# EAGLE board board (EAGLE 9.2.2)
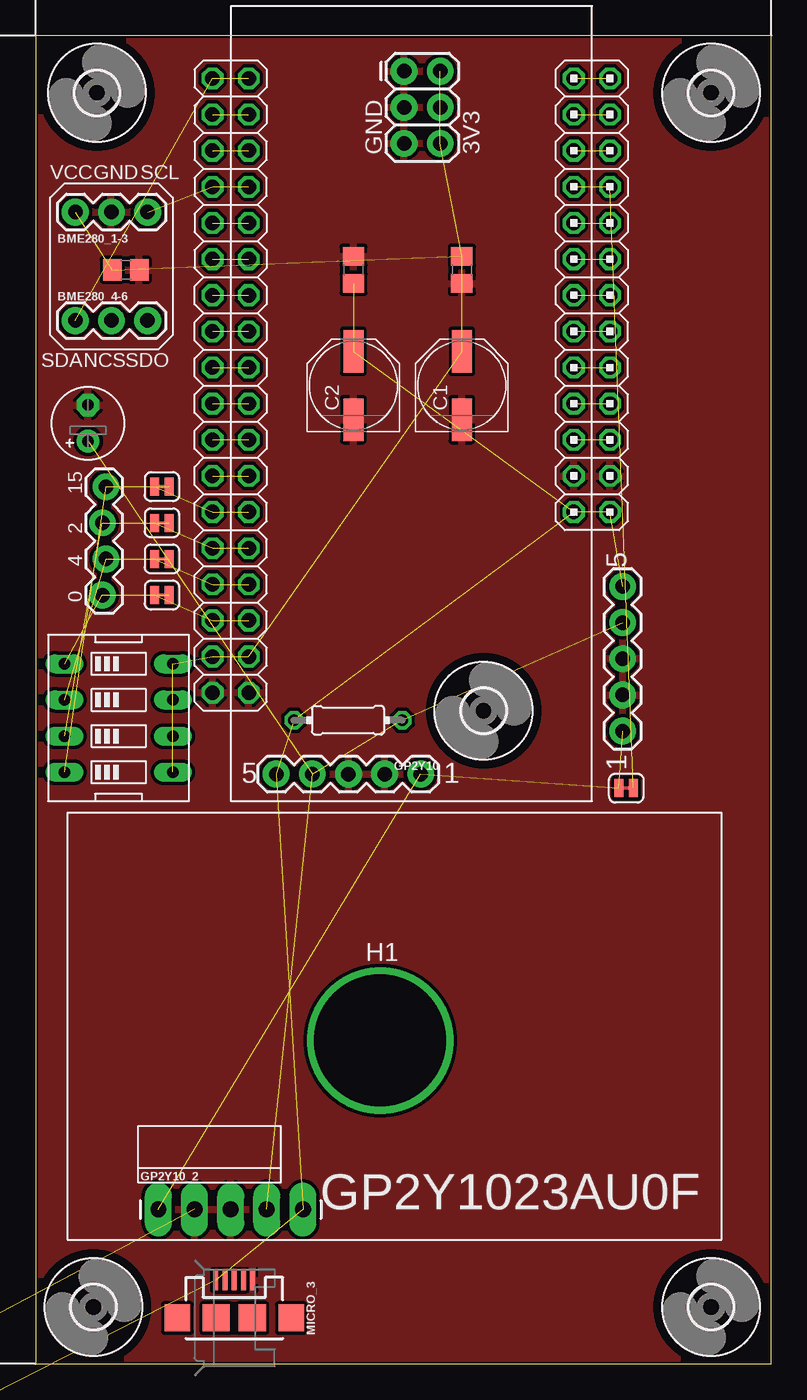
[diagram p0: board, top side]
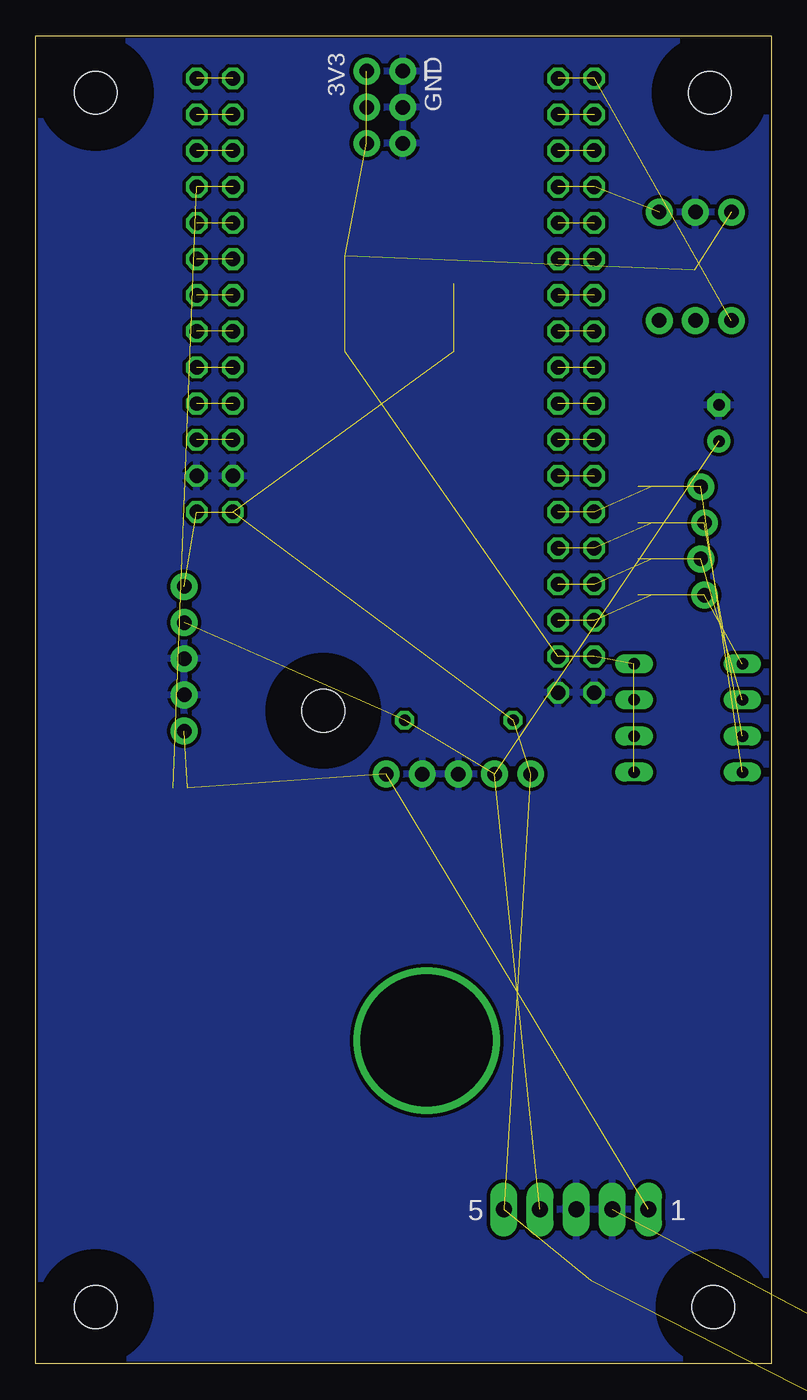
[diagram p1: board, bottom side, seen from below]

Size 51.73 x 93.37 mm. Coordinates in mm from the lower left corner, seen from the top.
Outline: 0,0 51.73,0 51.73,93.37 0,93.37 0,0
Copper layers (1*16): Top 0.035mm / dielectric 1.5mm / Bottom 0.035mm
Design rules "default *": minimum track width 6mil, minimum drill 0.35mm, track to track 6mil, track to pad 6mil, pad to pad 6mil, via to via 6mil, smd to smd 6mil, copper to edge 6mil, drill to drill 6mil, minimum pad ring 10mil, minimum via ring 8mil, stop-mask expansion 4mil, vias tented up to drill 0mil, thermal gap 10mil
Net classes: 0 default: width 0.254 mm, clearance 0.205 mm; 1 power: width 0.914 mm, clearance 0.254 mm

## Footprints (pad centres in the part's own frame; a part is rotated, then mirrored left to right if it is on the bottom)
1X03 = drill 1.016 pad 1.88: 1 0,0; 2 2.54,0; 3 5.08,0
PANASONIC_D = smd 3 x 1.4: + 2.4,0; - -2.4,0
C0805 = smd 1.3 x 1.5: 1 -0.95,0; 2 0.95,0
E2,5-5 = drill 0.813 pad 1.6: + -1.27,0 | drill 0.813 pad 1.6 octagon: - 1.27,0
0204/7 = drill 0.813 octagon: 1 -3.81,0; 2 3.81,0
1X05 = drill 1.016 pad 1.88: 1 0,0; 2 2.54,0; 3 5.08,0; 4 7.62,0; 5 10.16,0
1X05_LONGPADS = drill 1.118 pad 1.88 long: 1 0,0; 2 2.54,0; 3 5.08,0; 4 7.62,0; 5 10.16,0
PAD_0.3650 = drill 9.271 pad 9.271: 1 0,0
2,8 = hole 2.8: 0,0
3,0 = hole 3: 0,0
1X04_LOCK = drill 1.016 pad 1.88: 1 0,0.127; 2 2.54,-0.127; 3 5.08,0.127; 4 7.62,-0.127
SMT-JUMPER_2_NC_TRACE_SILK = smd 0.635 x 1.27: 1 -0.508,0; 2 0.508,0
2X18 = drill 1.016 octagon: 1 -21.59,-1.27; 2 -21.59,1.27; 3 -19.05,-1.27; 4 -19.05,1.27; 5 -16.51,-1.27; 6 -16.51,1.27; 7 -13.97,-1.27; 8 -13.97,1.27; 9 -11.43,-1.27; 10 -11.43,1.27; 11 -8.89,-1.27; 12 -8.89,1.27; 13 -6.35,-1.27; 14 -6.35,1.27; 15 -3.81,-1.27; 16 -3.81,1.27; 17 -1.27,-1.27; 18 -1.27,1.27; 19 1.27,-1.27; 20 1.27,1.27; 21 3.81,-1.27; 22 3.81,1.27; 23 6.35,-1.27; 24 6.35,1.27; 25 8.89,-1.27; 26 8.89,1.27; 27 11.43,-1.27; 28 11.43,1.27; 29 13.97,-1.27; 30 13.97,1.27; 31 16.51,-1.27; 32 16.51,1.27; 33 19.05,-1.27; 34 19.05,1.27; 35 21.59,-1.27; 36 21.59,1.27
2X13 = drill 1.016 octagon: 1 -15.24,-1.27; 2 -15.24,1.27; 3 -12.7,-1.27; 4 -12.7,1.27; 5 -10.16,-1.27; 6 -10.16,1.27; 7 -7.62,-1.27; 8 -7.62,1.27; 9 -5.08,-1.27; 10 -5.08,1.27; 11 -2.54,-1.27; 12 -2.54,1.27; 13 0,-1.27; 14 0,1.27; 15 2.54,-1.27; 16 2.54,1.27; 17 5.08,-1.27; 18 5.08,1.27; 19 7.62,-1.27; 20 7.62,1.27; 21 10.16,-1.27; 22 10.16,1.27; 23 12.7,-1.27; 24 12.7,1.27; 25 15.24,-1.27; 26 15.24,1.27
USB-MICROB = smd 1.4 x 0.35: D+ -2.65,0; D- -2.65,-0.65; GND -2.65,1.3; ID -2.65,0.65; VBUS -2.65,-1.3 | smd 1.9 x 1.8: MT1 0,-4; MT2 0,4 | smd 1.9 x 1.9: P$1 0,-1.27; P$2 0,1.27
2X3 = drill 1.016 pad 1.88: 1 0,0; 2 0,2.54; 3 2.54,0; 4 2.54,2.54; 5 5.08,0; 6 5.08,2.54
EDG-04 = drill 0.813 long: 1 -3.81,-3.81; 2 -1.27,-3.81; 3 1.27,-3.81; 4 3.81,-3.81; 5 3.81,3.81; 6 1.27,3.81; 7 -1.27,3.81; 8 -3.81,3.81

## Placement (x,y rotation side)
BME280_1-3  [1X03]  2.79,80.96 0 top
BME280_4-6  [1X03]  2.79,73.34 0 top
C1  [PANASONIC_D]  29.97,68.77 90 top
C2  [PANASONIC_D]  22.35,68.77 90 top
C3  100nF  [C0805]  22.35,76.9 90 top
C6  220uF  [E2,5-5]  3.69,66.13 90 top
C8  100nF  [C0805]  29.97,76.9 270 top
C9  100nF  [C0805]  6.35,76.9 180 top
CER  100nF  [C0805]  -15.75,44.38 0 top  (outside the outline)
DIP1  [0204/7]  -15.24,53.53 0 top  (outside the outline)
EL  [E2,5-5]  -15.24,66.23 0 top  (outside the outline)
GP2Y10  [1X05]  27.08,41.46 180 top
GP2Y10_1  [1X05]  41.27,44.49 90 top
GP2Y10_2  [1X05_LONGPADS]  8.64,10.86 0 top
H1  DRILL_0.3650_GP2Y10  [PAD_0.3650]  24.23,22.73 0 top
H2  18650  [2,8]  106.17,59.62 90 top  (outside the outline)
H3  ANT  [3,0]  31.5,45.91 0 top
H4  MOUNT-HOLE3.0  [3,0]  47.5,4 0 top
H5  MOUNT-HOLE3.0  [3,0]  4.06,4 0 top
H6  MOUNT-HOLE3.0  [3,0]  47.5,89.34 0 top
H7  MOUNT-HOLE3.0  [3,0]  4.32,89.34 0 top
J4  [1X04_LOCK]  4.83,54.04 90 top
JP1  Vout  [SMT-JUMPER_2_NC_TRACE_SILK]  41.53,40.47 0 top
JP2  [2X18]  13.72,68.77 90 top
JP3  [2X13]  39.12,75.12 90 top
JP4  [SMT-JUMPER_2_NC_TRACE_SILK]  8.89,61.66 180 top
JP5  [SMT-JUMPER_2_NC_TRACE_SILK]  8.89,59.12 180 top
JP6  [SMT-JUMPER_2_NC_TRACE_SILK]  8.89,56.58 180 top
JP7  [SMT-JUMPER_2_NC_TRACE_SILK]  8.89,54.04 180 top
MICRO_1  [USB-MICROB]  -125.48,-64.58 0 top  (outside the outline)
MICRO_2  [USB-MICROB]  -125.48,-75.76 0 top  (outside the outline)
MICRO_3  [USB-MICROB]  13.97,3.24 270 top
POWER  [2X3]  25.91,90.87 270 top
R1  150Ω  [0204/7]  21.97,45.25 180 top
REFERENCE  [1X05]  -13.7,26.18 90 top  (outside the outline)
SMD1  [PANASONIC_D]  -15.24,81.47 0 top  (outside the outline)
SW1  [EDG-04]  5.84,45.4 270 top

## Library data of the parts
BME280_1-3 BME280_4-6 GP2Y10 GP2Y10_1 GP2Y10_2 REFERENCE = SparkFun-Connectors
C1-C3 C6 C8 C9 CER EL SMD1 = rcl; SPICEPREFIX: C
DIP1 R1 = rcl; SPICEPREFIX: R
H1 = special-drill
H2-H7 = holes
J4 = SparkFun-Connectors; PROD_ID: CONN-09696
JP1 JP4-JP7 = SparkFun-Jumpers
JP2 JP3 = pinhead
MICRO_1-MICRO_3 = SparkFun-Connectors; PROD_ID: CONN-09505; SF_ID: PRT-08533
POWER = SparkFun-Connectors; PROD_ID: CONN-09701
SW1 = special

## Nets
3.3V [power]: BME280_1-3.1 C1.+ C8.1 C9.2 JP2.3 JP2.4 POWER.2 POWER.4 POWER.6 SW1.5 SW1.6 SW1.7 SW1.8
5V [power]: C2.+ C3.1 GP2Y10.5 GP2Y10_1.5 GP2Y10_2.5 JP3.1 JP3.2 MICRO_1.VBUS MICRO_2.VBUS MICRO_3.VBUS R1.2
DIP1: JP2.5 JP2.6 JP7.2
DIP2: JP2.7 JP2.8 JP6.2
DIP3: JP2.9 JP2.10 JP5.2
DIP4: JP2.11 JP2.12 JP4.2
GND [power]: BME280_1-3.2 C1.- C2.- C3.2 C6.- C8.2 C9.1 GP2Y10.2 GP2Y10.3 GP2Y10_1.2 GP2Y10_1.3 GP2Y10_2.2 GP2Y10_2.3 JP2.1 JP2.2 JP3.3 JP3.4 MICRO_1.GND MICRO_2.GND MICRO_3.GND POWER.1 POWER.3 POWER.5
N$1: J4.1 JP7.1 SW1.1
N$2: J4.2 JP6.1 SW1.2
N$4: JP2.33 JP2.34
N$5: JP2.31 JP2.32
N$7: JP2.27 JP2.28
N$8: JP2.25 JP2.26
N$9: JP3.25 JP3.26
N$10: JP3.23 JP3.24
N$11: JP3.21 JP3.22
N$12: JP3.17 JP3.18
N$13: J4.3 JP5.1 SW1.3
N$14: JP3.15 JP3.16
N$15: JP3.13 JP3.14
N$16: JP3.11 JP3.12
N$17: JP3.9 JP3.10
N$18: JP3.7 JP3.8
N$19: JP3.5 JP3.6
N$21: J4.4 JP4.1 SW1.4
N$28: JP2.13 JP2.14
N$29: JP2.15 JP2.16
N$30: JP2.17 JP2.18
N$31: JP2.19 JP2.20
N$32: JP2.21 JP2.22
N$33: JP2.23 JP2.24
SCL: BME280_1-3.3 JP2.29 JP2.30
SDA: BME280_4-6.1 JP2.35 JP2.36
VLED [power]: C6.+ GP2Y10.4 GP2Y10_1.4 GP2Y10_2.4 R1.1
VOUT: JP1.2 JP3.19 JP3.20
VOUT_1: GP2Y10.1 GP2Y10_1.1 GP2Y10_2.1 JP1.1

## Tracks (layer width: path | path; a pad name or v marks a point on that pad's centre or on a via)
3.3V  (12 unrouted)
5V  (10 unrouted)
  Top 0.914: GP2Y10_1.5
DIP1  (2 unrouted)
DIP2  (2 unrouted)
DIP3  (2 unrouted)
DIP4  (2 unrouted)
GND  (2 unrouted)
  Top 0.914: GP2Y10_1.2 | GP2Y10_1.3
  pour Bottom: -129.54,170.37 -129.54,-58.23 200.66,-58.23 200.66,170.37
  pour Top: -129.54,170.37 -129.54,-58.23 200.66,-58.23 200.66,170.37
N$1  (2 unrouted)
N$2  (2 unrouted)
N$4  (1 unrouted)
N$5  (1 unrouted)
N$7  (1 unrouted)
N$8  (1 unrouted)
N$9  (1 unrouted)
N$10  (1 unrouted)
N$11  (1 unrouted)
N$12  (1 unrouted)
N$13  (2 unrouted)
N$14  (1 unrouted)
N$15  (1 unrouted)
N$16  (1 unrouted)
N$17  (1 unrouted)
N$18  (1 unrouted)
N$19  (1 unrouted)
N$21  (2 unrouted)
N$28  (1 unrouted)
N$29  (1 unrouted)
N$30  (1 unrouted)
N$31  (1 unrouted)
N$32  (1 unrouted)
N$33  (1 unrouted)
SCL  (2 unrouted)
SDA  (2 unrouted)
VLED  (4 unrouted)
  Top 0.914: GP2Y10.4
VOUT  (2 unrouted)
VOUT_1  (3 unrouted)
  Top 0.914: GP2Y10.1

## Text on the board
tPlace: GND | 3V3 | VCC | GND | SCL | SDA | NCS | SDO | 15 | 2 | 5 | 4 | 0 | 1 | 5 | 1 | GP2Y1023AU0F
bPlace: GND | 3V3 | 18650 | 1 | 5